# EAGLE board Weather-MM-Carrier-Panel (EAGLE 9.4.2), part 1 of 2
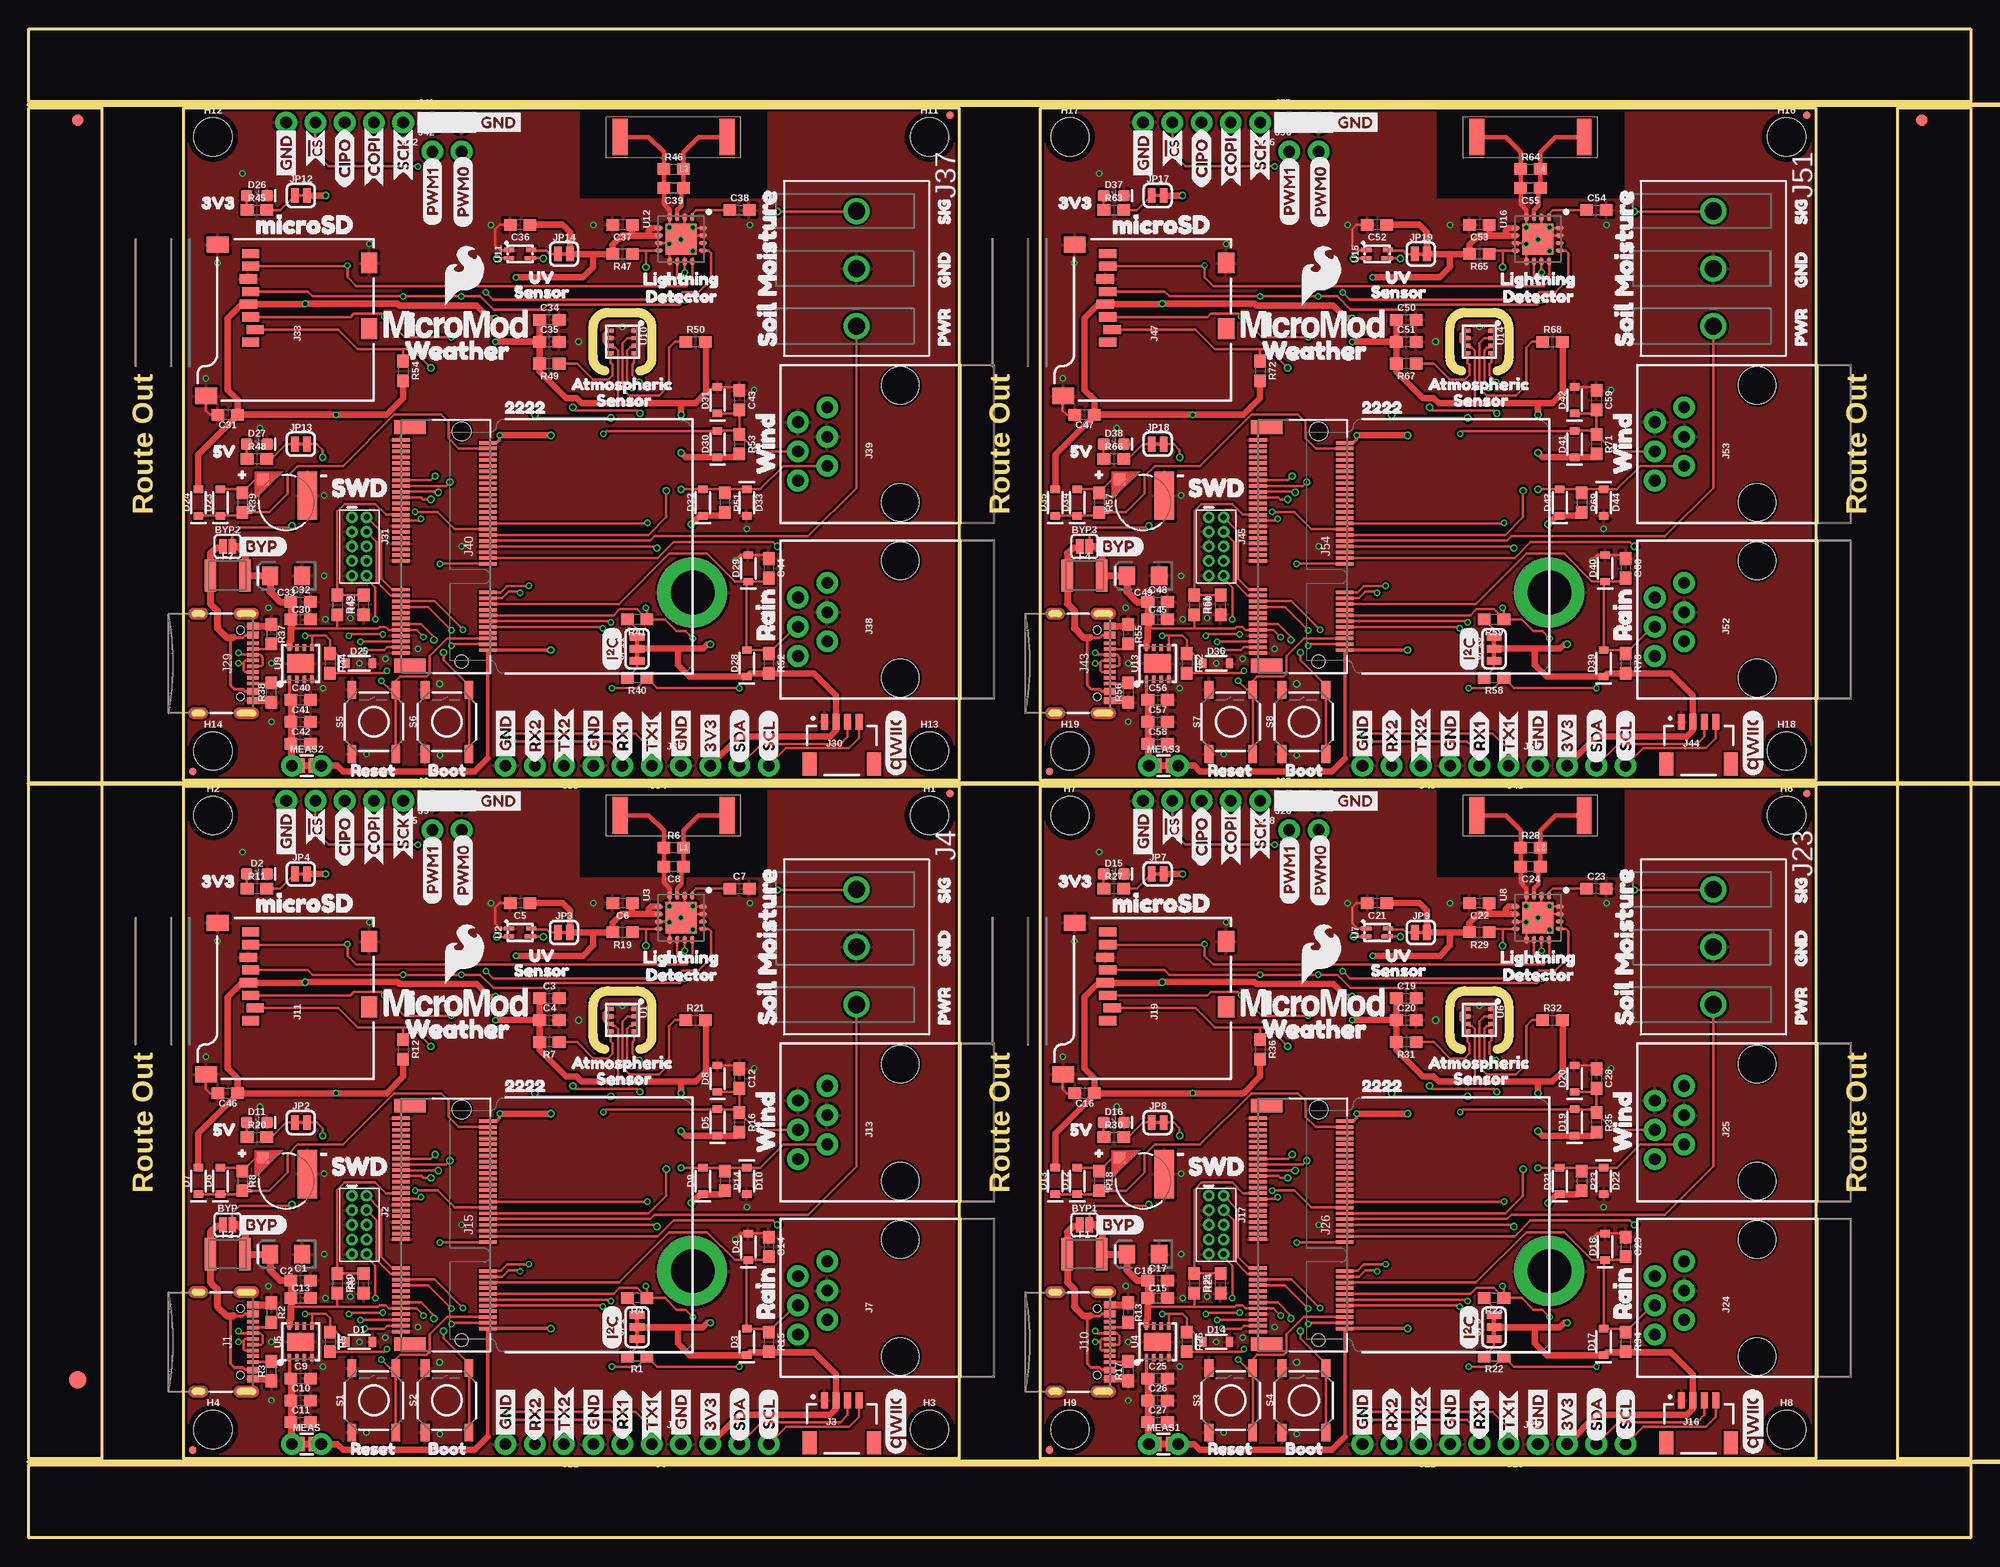
[diagram p0: board, top side]
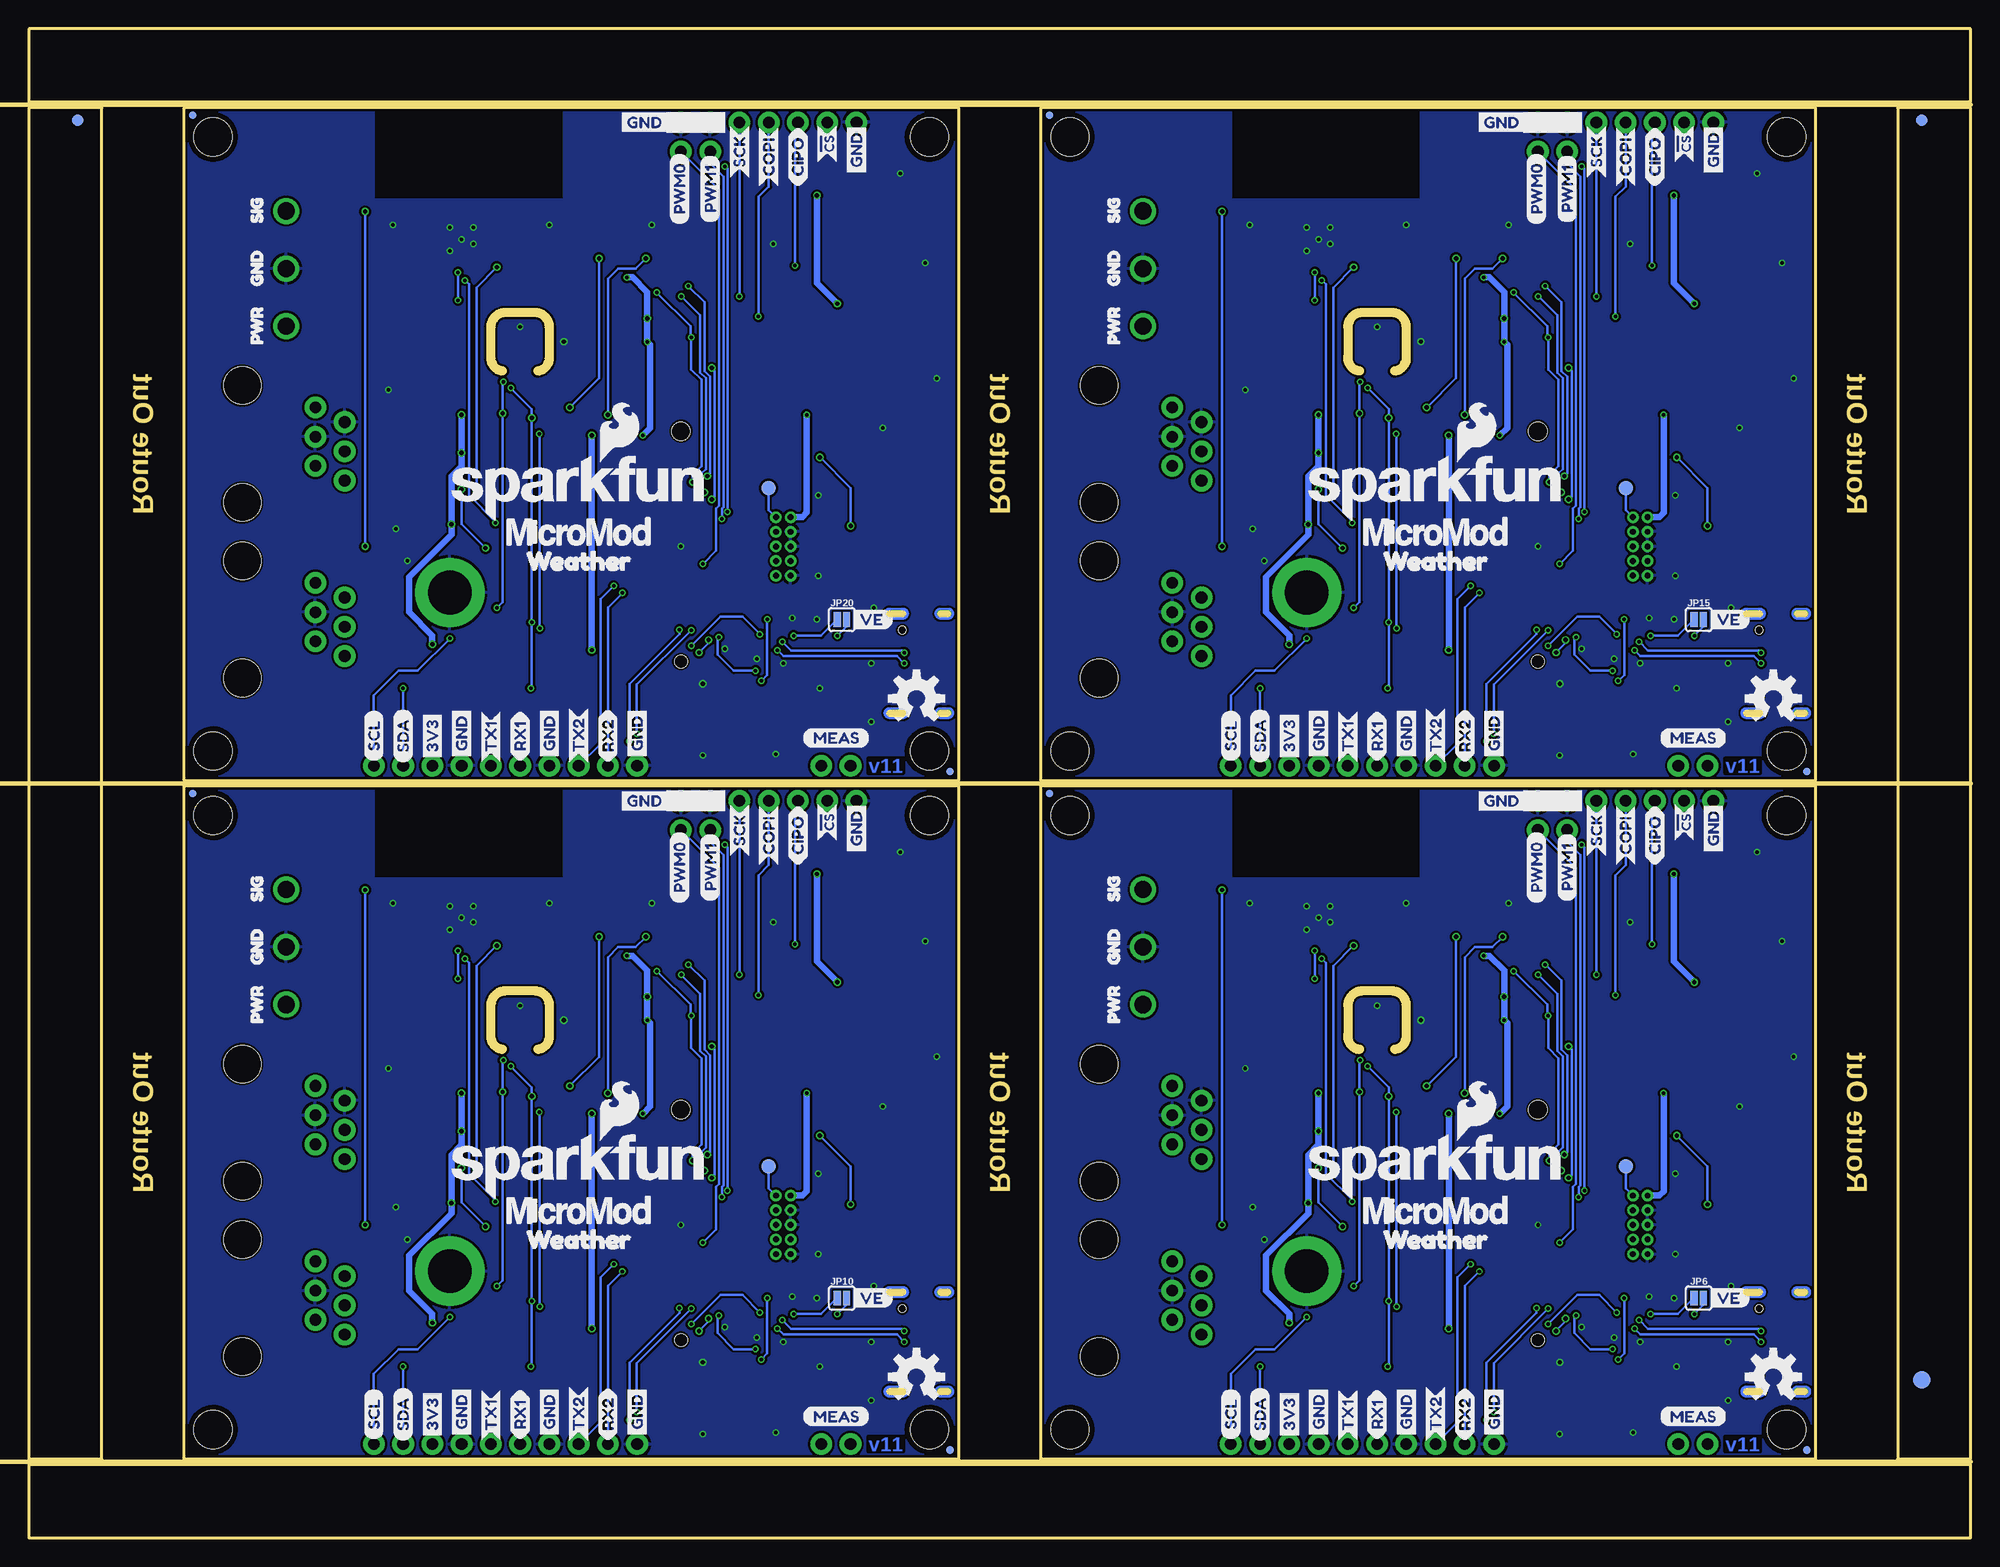
[diagram p1: board, bottom side, seen from below]

Size 168.66 x 131.06 mm. Coordinates in mm from the lower left corner, seen from the top.
Outline: 50.04,42.42 arc-90 49.02,43.69 49.02,46.23 arc-90 50.29,47.5 52.83,47.5 arc-90 54.1,46.23 54.1,43.69 arc-90 53.09,42.42
Outline: 124.46,42.42 arc-90 123.44,43.69 123.44,46.23 arc-90 124.71,47.5 127.25,47.5 arc-90 128.52,46.23 128.52,43.69 arc-90 127.51,42.42
Outline: 50.04,101.35 arc-90 49.02,102.62 49.02,105.16 arc-90 50.29,106.43 52.83,106.43 arc-90 54.1,105.16 54.1,102.62 arc-90 53.09,101.35
Outline: 124.46,101.35 arc-90 123.44,102.62 123.44,105.16 arc-90 124.71,106.43 127.25,106.43 arc-90 128.52,105.16 128.52,102.62 arc-90 127.51,101.35
Outline: 13.46,6.86 13.46,65.28 80.77,65.28 80.77,6.86 13.46,6.86
Outline: 87.88,6.86 87.88,65.28 155.19,65.28 155.19,6.86 87.88,6.86
Outline: 13.46,65.79 13.46,124.21 80.77,124.21 80.77,65.79 13.46,65.79
Outline: 87.88,65.79 87.88,124.21 155.19,124.21 155.19,65.79 87.88,65.79
Outline: 0,6.35 168.66,6.35 168.66,0 0,0 0,6.35
Outline: 162.31,124.21 168.66,124.21 168.66,6.86 162.31,6.86 162.31,124.21
Outline: 0,131.06 168.66,131.06 168.66,124.71 0,124.71 0,131.06
Outline: 0,124.21 6.35,124.21 6.35,6.86 0,6.86 0,124.21
Copper layers (1*16): Top 0.035mm / dielectric 1.5mm / Bottom 0.035mm
Design rules "Weather-MM-Carrier": minimum track width 4mil, minimum drill 6mil, track to track 4mil, track to pad 4mil, pad to pad 4mil, via to via 4mil, smd to smd 4mil, copper to edge 4mil, drill to drill 4mil, minimum pad ring 5mil, minimum via ring 5mil, stop-mask expansion 4mil, vias tented up to drill 25mil, thermal gap 10mil
Net classes: 0 default: width 0 mm, drill 0 mm
tRestrict: 16 lines
Milling: 3 lines

## Footprints (pad centres in the part's own frame; a part is rotated, then mirrored left to right if it is on the bottom)
ML414H_IV01E = smd 1 x 1: + 2.022,2.032 | smd 4.2 x 1.7: - 0.6,-1.85
SMT-JUMPER_2_NO_SILK = smd 0.635 x 1.27: 1 -0.406,0; 2 0.406,0
0603 = smd 1.1 x 1: 1 -0.85,0; 2 0.85,0
EIA3216 = smd 1.4 x 1.6: + 1.4,0; - -1.4,0
SOD-323 = smd 0.63 x 0.83: A 1.15,0; C -1.15,0
LED-0603 = smd 1 x 1: A -0.877,0; C 0.877,0
FIDUCIAL-1X2 = smd 1 x 1: 1 0,0
FIDUCIAL-1.5X3 = smd 1.5 x 1.5: 1 0,0
1210 = smd 1 x 2.8: 1 -1.5,0; 2 1.5,0
FIDUCIAL-MICRO = smd 0.635 x 0.635: 1 0,0
STAND-OFF = hole 3.302: 0,0
STAND-OFF-REFLOW-M2.5 = drill 3.8 pad 6: 1 0,0
USB-C-16P-2LAYER-PADS = smd 0.3 x 1: A5 -1.25,-0.34; A6 -0.25,-0.34; A7 0.25,-0.34; A8 1.25,-0.34; B5 1.75,-0.34; B6 0.75,-0.34; B7 -0.75,-0.34; B8 -1.75,-0.34 | smd 0.6 x 1: GND -3.225,-0.34; GND2 3.225,-0.34; VBUS1 -2.45,-0.34; VBUS2 2.45,-0.34 | drill 0.4 pad 0.6 long: SHLD1 -4.318,-0.915; SHLD2 4.318,-0.915; SHLD3 -4.318,-5.095; SHLD4 4.318,-5.095 | hole 0.65: -2.89,-1.445; 2.89,-1.445
2X5-PTH-1.27MM = drill 0.508 pad 1: 1 -2.54,-0.635; 2 -2.54,0.635; 3 -1.27,-0.635; 4 -1.27,0.635; 5 0,-0.635; 6 0,0.635; 7 1.27,-0.635; 8 1.27,0.635; 9 2.54,-0.635; 10 2.54,0.635
JST04_1MM_RA = smd 0.6 x 1.35: 1 -1.5,0; 2 -0.5,0; 3 0.5,0; 4 1.5,0 | smd 1.2 x 2: NC1 2.8,-3.675; NC2 -2.8,-3.675
LATCHTERMINAL-5MM-3 = drill 1.5: 1 -5,0; 2 0,0; 3 5,0
1X05_NO_SILK = drill 1.016 pad 1.88: 1 0,0; 2 2.54,0; 3 5.08,0; 4 7.62,0; 5 10.16,0
1X03_NO_SILK = drill 1.016 pad 1.88: 1 0,0; 2 2.54,0; 3 5.08,0
RJ11-6 = drill 1.016 pad 1.88: 1 -3.175,8.89; 2 -1.905,6.35; 3 -0.635,8.89; 4 0.635,6.35; 5 1.905,8.89; 6 3.175,6.35 | hole 3.251: -5.08,0; 5.08,0
1X02_NO_SILK = drill 1.016 pad 1.88: 1 0,0; 2 2.54,0
MICRO-SD-SOCKET = smd 1.8 x 1.4: CD1 -2.05,0.4; CD2 -7.75,0.4 | smd 0.8 x 1.5: CS/DAT3 -7.84,10.3; DAT1 -1.24,10.7; DAT2 -8.94,10.7; DI/CMD -6.74,10.7; DO/DAT0 -2.34,10.7; GND -3.44,10.9; SCLK -4.54,10.7; VCC -5.64,10.9 | smd 1.4 x 1.9: GND1 -13.6,14.55; GND3 -0.45,13.55
1X04_NO_SILK = drill 1.016 pad 1.88: 1 0,0; 2 2.54,0; 3 5.08,0; 4 7.62,0
M.2-CONNECTOR-E = smd 0.3 x 1.55: 1 9.25,-5.275; 2 9,2.275; 3 8.75,-5.275; 4 8.5,2.275; 5 8.25,-5.275; 6 8,2.275; 7 7.75,-5.275; 8 7.5,2.275; 9 7.25,-5.275; 10 7,2.275; 11 6.75,-5.275; 12 6.5,2.275; 13 6.25,-5.275; 14 6,2.275; 15 5.75,-5.275; 16 5.5,2.275; 17 5.25,-5.275; 18 5,2.275; 19 4.75,-5.275; 20 4.5,2.275; 21 4.25,-5.275; 22 4,2.275; 23 3.75,-5.275; 32 1.5,2.275; 33 1.25,-5.275; 34 1,2.275; 35 0.75,-5.275; 36 0.5,2.275; 37 0.25,-5.275; 38 0,2.275; 39 -0.25,-5.275; 40 -0.5,2.275; 41 -0.75,-5.275; 42 -1,2.275; 43 -1.25,-5.275; 44 -1.5,2.275; 45 -1.75,-5.275; 46 -2,2.275; 47 -2.25,-5.275; 48 -2.5,2.275; 49 -2.75,-5.275; 50 -3,2.275; 51 -3.25,-5.275; 52 -3.5,2.275; 53 -3.75,-5.275; 54 -4,2.275; 55 -4.25,-5.275; 56 -4.5,2.275; 57 -4.75,-5.275; 58 -5,2.275; 59 -5.25,-5.275; 60 -5.5,2.275; 61 -5.75,-5.275; 62 -6,2.275; 63 -6.25,-5.275; 64 -6.5,2.275; 65 -6.75,-5.275; 66 -7,2.275; 67 -7.25,-5.275; 68 -7.5,2.275; 69 -7.75,-5.275; 70 -8,2.275; 71 -8.25,-5.275; 72 -8.5,2.275; 73 -8.75,-5.275; 74 -9,2.275; 75 -9.25,-5.275 | smd 1.2 x 2.75: A1 10.35,-4.5; A2 -10.35,-4.5 | hole 1.1: 10,0 | hole 1.6: -10,0
SMT-JUMPER_3_2-NC_TRACE_SILK = smd 0.66 x 1.27: 1 -1.041,0; 2 0,0; 3 1.041,0
SMT-JUMPER_2_NC_TRACE_SILK = smd 0.66 x 1.27: 1 -0.521,0; 2 0.521,0
MA5532-AE = smd 1.3 x 3.2: 1 -4.65,0; 2 4.65,0
COMBO-JUMPER_2_NC_TRACE = smd 0.635 x 1.27: 1 -0.508,0; 2 0.508,0 | drill 1.016 pad 1.88: 3 -1.27,0; 4 1.27,0
TACTILE_SWITCH_SMD_5.2MM = smd 1.524 x 0.762: 1 -2.794,1.905; 2 2.794,1.905; 3 -2.794,-1.905; 4 2.794,-1.905
PAD.03X.05 = smd 1.27 x 1.27: P$1 0,0
LGA-8-2.5X2.5 = smd 0.35 x 0.5: 1 -0.975,1.025; 2 -0.325,1.025; 3 0.325,1.025; 4 0.975,1.025; 5 0.975,-1.025; 6 0.325,-1.025; 7 -0.325,-1.025; 8 -0.975,-1.025
VEML6075_A3OP = smd 0.9 x 0.35: 1 -0.95,0.35; 2 -0.95,-0.35; 4 0.95,0.35 | smd 1 x 0.35: 3 0.9,-0.35
16LD_MLPQ = smd 0.7 x 0.35: 1 -1.919,0.968; 2 -1.919,0.318; 3 -1.919,-0.332; 4 -1.919,-0.982; 9 1.908,-0.982; 10 1.908,-0.332; 11 1.908,0.318; 12 1.908,0.968 | smd 0.35 x 0.7: 5 -0.982,-1.917; 6 -0.332,-1.917; 7 0.318,-1.917; 8 0.968,-1.917; 13 0.968,1.907; 14 0.318,1.907; 15 -0.332,1.907; 16 -0.982,1.907 | smd 2.7 x 2.7: 17 -0.007,-0.007
UDFN-8 = smd 0.3 x 0.65: 1 -0.975,-1.375; 2 -0.325,-1.375; 3 0.325,-1.375; 4 0.975,-1.375; 5 0.975,1.375; 6 0.325,1.375; 7 -0.325,1.375; 8 -0.975,1.375 | smd 2.35 x 1.6: EP 0,0

## Placement (x,y rotation side)
BT1  ML414H  [ML414H_IV01E]  22.35,30.99 90 top
BT2  ML414H  [ML414H_IV01E]  96.77,30.99 90 top
BT3  ML414H  [ML414H_IV01E]  22.35,89.92 90 top
BT4  ML414H  [ML414H_IV01E]  96.77,89.92 90 top
BYP  JUMPER-SMT_2_NO_SILK  [SMT-JUMPER_2_NO_SILK]  17.27,27.18 0 top
BYP1  JUMPER-SMT_2_NO_SILK  [SMT-JUMPER_2_NO_SILK]  91.69,27.18 0 top
BYP2  JUMPER-SMT_2_NO_SILK  [SMT-JUMPER_2_NO_SILK]  17.27,86.11 0 top
BYP3  JUMPER-SMT_2_NO_SILK  [SMT-JUMPER_2_NO_SILK]  91.69,86.11 0 top
C1  0.1uF  [0603]  23.62,22.35 0 top
C2  10uF  [EIA3216]  22.35,24.64 180 top
C3  0.1uF  [0603]  45.21,46.86 0 top
C4  0.1uF  [0603]  45.21,44.96 0 top
C5  0.1uF  [0603]  42.67,55.12 180 top
C6  1.0uF  [0603]  51.56,55.12 180 top
C7  10uF  [0603]  61.72,56.39 0 top
C8  1nF  [0603]  56.01,58.29 180 top
C9  10uF  [0603]  23.62,13.84 0 top
C10  1.0uF  [0603]  23.62,11.94 0 top
C11  0.22uF  [0603]  23.62,10.03 0 top
C12  0.1uF  [0603]  61.72,39.88 270 top
C13  0.22uF  [0603]  23.62,20.83 0 top
C14  0.1uF  [0603]  64.26,25.27 270 top
C15  0.22uF  [0603]  98.04,20.83 0 top
C16  0.1uF  [0603]  91.69,38.61 180 top
C17  0.1uF  [0603]  98.04,22.35 0 top
C18  10uF  [EIA3216]  96.77,24.64 180 top
C19  0.1uF  [0603]  119.63,46.86 0 top
C20  0.1uF  [0603]  119.63,44.96 0 top
C21  0.1uF  [0603]  117.09,55.12 180 top
C22  1.0uF  [0603]  125.98,55.12 180 top
C23  10uF  [0603]  136.14,56.39 0 top
C24  1nF  [0603]  130.43,58.29 180 top
C25  10uF  [0603]  98.04,13.84 0 top
C26  1.0uF  [0603]  98.04,11.94 0 top
C27  0.22uF  [0603]  98.04,10.03 0 top
C28  0.1uF  [0603]  136.14,39.88 270 top
C29  0.1uF  [0603]  138.68,25.27 270 top
C30  0.22uF  [0603]  23.62,79.76 0 top
C31  0.1uF  [0603]  17.27,97.54 180 top
C32  0.1uF  [0603]  23.62,81.28 0 top
C33  10uF  [EIA3216]  22.35,83.57 180 top
C34  0.1uF  [0603]  45.21,105.79 0 top
C35  0.1uF  [0603]  45.21,103.89 0 top
C36  0.1uF  [0603]  42.67,114.05 180 top
C37  1.0uF  [0603]  51.56,114.05 180 top
C38  10uF  [0603]  61.72,115.32 0 top
C39  1nF  [0603]  56.01,117.22 180 top
C40  10uF  [0603]  23.62,72.77 0 top
C41  1.0uF  [0603]  23.62,70.87 0 top
C42  0.22uF  [0603]  23.62,68.96 0 top
C43  0.1uF  [0603]  61.72,98.81 270 top
C44  0.1uF  [0603]  64.26,84.2 270 top
C45  0.22uF  [0603]  98.04,79.76 0 top
C46  0.1uF  [0603]  17.27,38.61 180 top
C47  0.1uF  [0603]  91.69,97.54 180 top
C48  0.1uF  [0603]  98.04,81.28 0 top
C49  10uF  [EIA3216]  96.77,83.57 180 top
C50  0.1uF  [0603]  119.63,105.79 0 top
C51  0.1uF  [0603]  119.63,103.89 0 top
C52  0.1uF  [0603]  117.09,114.05 180 top
C53  1.0uF  [0603]  125.98,114.05 180 top
C54  10uF  [0603]  136.14,115.32 0 top
C55  1nF  [0603]  130.43,117.22 180 top
C56  10uF  [0603]  98.04,72.77 0 top
C57  1.0uF  [0603]  98.04,70.87 0 top
C58  0.22uF  [0603]  98.04,68.96 0 top
C59  0.1uF  [0603]  136.14,98.81 270 top
C60  0.1uF  [0603]  138.68,84.2 270 top
D1  3.3V  [SOD-323]  28.7,17.02 0 top
D2  RED  [LED-0603]  19.81,57.66 0 top
D3  250mA/100V  [SOD-323]  62.36,17.02 90 top
D4  250mA/100V  [SOD-323]  62.48,25.27 90 top
D5  250mA/100V  [SOD-323]  59.82,36.07 90 top
D6  3A/10V/280mV  [SOD-323]  16.64,30.99 90 top
D7  1A/23V/620mV  [SOD-323]  14.73,30.99 90 top
D8  250mA/100V  [SOD-323]  59.82,39.88 90 top
D9  250mA/100V  [SOD-323]  58.55,30.99 90 top
D10  250mA/100V  [SOD-323]  62.36,30.99 270 top
D11  RED  [LED-0603]  19.81,36.07 0 top
D12  3A/10V/280mV  [SOD-323]  91.06,30.99 90 top
D13  1A/23V/620mV  [SOD-323]  89.15,30.99 90 top
D14  3.3V  [SOD-323]  103.12,17.02 0 top
D15  RED  [LED-0603]  94.23,57.66 0 top
D16  RED  [LED-0603]  94.23,36.07 0 top
D17  250mA/100V  [SOD-323]  136.78,17.02 90 top
D18  250mA/100V  [SOD-323]  136.91,25.27 90 top
D19  250mA/100V  [SOD-323]  134.24,36.07 90 top
D20  250mA/100V  [SOD-323]  134.24,39.88 90 top
D21  250mA/100V  [SOD-323]  132.97,30.99 90 top
D22  250mA/100V  [SOD-323]  136.78,30.99 270 top
D23  3A/10V/280mV  [SOD-323]  16.64,89.92 90 top
D24  1A/23V/620mV  [SOD-323]  14.73,89.92 90 top
D25  3.3V  [SOD-323]  28.7,75.95 0 top
D26  RED  [LED-0603]  19.81,116.59 0 top
D27  RED  [LED-0603]  19.81,95 0 top
D28  250mA/100V  [SOD-323]  62.36,75.95 90 top
D29  250mA/100V  [SOD-323]  62.48,84.2 90 top
D30  250mA/100V  [SOD-323]  59.82,95 90 top
D31  250mA/100V  [SOD-323]  59.82,98.81 90 top
D32  250mA/100V  [SOD-323]  58.55,89.92 90 top
D33  250mA/100V  [SOD-323]  62.36,89.92 270 top
D34  3A/10V/280mV  [SOD-323]  91.06,89.92 90 top
D35  1A/23V/620mV  [SOD-323]  89.15,89.92 90 top
D36  3.3V  [SOD-323]  103.12,75.95 0 top
D37  RED  [LED-0603]  94.23,116.59 0 top
D38  RED  [LED-0603]  94.23,95 0 top
D39  250mA/100V  [SOD-323]  136.78,75.95 90 top
D40  250mA/100V  [SOD-323]  136.91,84.2 90 top
D41  250mA/100V  [SOD-323]  134.24,95 90 top
D42  250mA/100V  [SOD-323]  134.24,98.81 90 top
D43  250mA/100V  [SOD-323]  132.97,89.92 90 top
D44  250mA/100V  [SOD-323]  136.78,89.92 270 top
E$1  [FIDUCIAL-1X2]  4.23,123.13 0 top
E$2  [FIDUCIAL-1X2]  4.23,123.13 0 bottom
E$3  [FIDUCIAL-1X2]  164.42,123.13 0 top
E$4  [FIDUCIAL-1X2]  164.42,123.13 0 bottom
E$5  [FIDUCIAL-1.5X3]  4.23,13.72 0 top
E$6  [FIDUCIAL-1.5X3]  4.23,13.72 0 bottom
F1  6V/2A  [1210]  91.69,24.64 0 top
F2  6V/2A  [1210]  17.27,24.64 0 top
F3  6V/2A  [1210]  17.27,83.57 0 top
F4  6V/2A  [1210]  91.69,83.57 0 top
FD1  FIDUCIALUFIDUCIAL  [FIDUCIAL-MICRO]  14.22,7.62 0 top
FD2  FIDUCIALUFIDUCIAL  [FIDUCIAL-MICRO]  80.01,64.64 0 top
FD3  FIDUCIALUFIDUCIAL  [FIDUCIAL-MICRO]  14.22,7.62 0 bottom
FD4  FIDUCIALUFIDUCIAL  [FIDUCIAL-MICRO]  80.01,64.64 0 bottom
FD5  FIDUCIALUFIDUCIAL  [FIDUCIAL-MICRO]  88.65,7.62 0 top
FD6  FIDUCIALUFIDUCIAL  [FIDUCIAL-MICRO]  154.43,64.64 0 top
FD7  FIDUCIALUFIDUCIAL  [FIDUCIAL-MICRO]  88.65,7.62 0 bottom
FD8  FIDUCIALUFIDUCIAL  [FIDUCIAL-MICRO]  154.43,64.64 0 bottom
FD9  FIDUCIALUFIDUCIAL  [FIDUCIAL-MICRO]  14.22,66.55 0 top
FD10  FIDUCIALUFIDUCIAL  [FIDUCIAL-MICRO]  80.01,123.57 0 top
FD11  FIDUCIALUFIDUCIAL  [FIDUCIAL-MICRO]  14.22,66.55 0 bottom
FD12  FIDUCIALUFIDUCIAL  [FIDUCIAL-MICRO]  80.01,123.57 0 bottom
FD13  FIDUCIALUFIDUCIAL  [FIDUCIAL-MICRO]  88.65,66.55 0 top
FD14  FIDUCIALUFIDUCIAL  [FIDUCIAL-MICRO]  154.43,123.57 0 top
FD15  FIDUCIALUFIDUCIAL  [FIDUCIAL-MICRO]  88.65,66.55 0 bottom
FD16  FIDUCIALUFIDUCIAL  [FIDUCIAL-MICRO]  154.43,123.57 0 bottom
H1  STAND-OFF  [STAND-OFF]  78.23,62.74 0 top
H2  STAND-OFF  [STAND-OFF]  16,62.74 0 top
H3  STAND-OFF  [STAND-OFF]  78.23,9.4 0 top
H4  STAND-OFF  [STAND-OFF]  16,9.4 0 top
H5  STAND-OFF-REFLOW2.5MM_TALL  [STAND-OFF-REFLOW-M2.5]  57.66,23.16 0 top
H6  STAND-OFF  [STAND-OFF]  152.65,62.74 0 top
H7  STAND-OFF  [STAND-OFF]  90.42,62.74 0 top
H8  STAND-OFF  [STAND-OFF]  152.65,9.4 0 top
H9  STAND-OFF  [STAND-OFF]  90.42,9.4 0 top
H10  STAND-OFF-REFLOW2.5MM_TALL  [STAND-OFF-REFLOW-M2.5]  132.08,23.16 0 top
H11  STAND-OFF  [STAND-OFF]  78.23,121.67 0 top
H12  STAND-OFF  [STAND-OFF]  16,121.67 0 top
H13  STAND-OFF  [STAND-OFF]  78.23,68.33 0 top
H14  STAND-OFF  [STAND-OFF]  16,68.33 0 top
H15  STAND-OFF-REFLOW2.5MM_TALL  [STAND-OFF-REFLOW-M2.5]  57.66,82.09 0 top
H16  STAND-OFF  [STAND-OFF]  152.65,121.67 0 top
H17  STAND-OFF  [STAND-OFF]  90.42,121.67 0 top
H18  STAND-OFF  [STAND-OFF]  152.65,68.33 0 top
H19  STAND-OFF  [STAND-OFF]  90.42,68.33 0 top
H20  STAND-OFF-REFLOW2.5MM_TALL  [STAND-OFF-REFLOW-M2.5]  132.08,82.09 0 top
J1  [USB-C-16P-2LAYER-PADS]  19.81,17.02 270 top
J2  JTAG  [2X5-PTH-1.27MM]  28.7,27.18 270 top
J3  QWIIC_RIGHT_ANGLE  [JST04_1MM_RA]  70.61,11.94 0 top
J4  [LATCHTERMINAL-5MM-3]  71.88,51.31 270 top
J5  [1X05_NO_SILK]  32.51,64.01 180 top
J6  [1X03_NO_SILK]  54.1,8.13 180 top
J7  RJ11 - RAIN  [RJ11-6]  75.69,20.83 90 top
J8  [1X02_NO_SILK]  35.05,64.01 0 top
J9  [1X02_NO_SILK]  35.05,61.47 0 top
J10  [USB-C-16P-2LAYER-PADS]  94.23,17.02 270 top
J11  microSD  [MICRO-SD-SOCKET]  29.97,53.85 90 top
J12  [1X03_NO_SILK]  46.48,8.13 180 top
J13  RJ11 - WIND  [RJ11-6]  75.69,36.07 90 top
J14  [1X04_NO_SILK]  56.64,8.13 0 top
J15  MICROMOD-2222-C  [M.2-CONNECTOR-E]  37.59,27.18 270 top
J16  QWIIC_RIGHT_ANGLE  [JST04_1MM_RA]  145.03,11.94 0 top
J17  JTAG  [2X5-PTH-1.27MM]  103.12,27.18 270 top
J18  [1X05_NO_SILK]  106.93,64.01 180 top
J19  microSD  [MICRO-SD-SOCKET]  104.39,53.85 90 top
J20  [1X03_NO_SILK]  128.52,8.13 180 top
J21  [1X03_NO_SILK]  120.9,8.13 180 top
J22  [1X04_NO_SILK]  131.06,8.13 0 top
J23  [LATCHTERMINAL-5MM-3]  146.3,51.31 270 top
J24  RJ11 - RAIN  [RJ11-6]  150.11,20.83 90 top
J25  RJ11 - WIND  [RJ11-6]  150.11,36.07 90 top
J26  MICROMOD-2222-C  [M.2-CONNECTOR-E]  112.01,27.18 270 top
J27  [1X02_NO_SILK]  109.47,64.01 0 top
J28  [1X02_NO_SILK]  109.47,61.47 0 top
J29  [USB-C-16P-2LAYER-PADS]  19.81,75.95 270 top
J30  QWIIC_RIGHT_ANGLE  [JST04_1MM_RA]  70.61,70.87 0 top
J31  JTAG  [2X5-PTH-1.27MM]  28.7,86.11 270 top
J32  [1X05_NO_SILK]  32.51,122.94 180 top
J33  microSD  [MICRO-SD-SOCKET]  29.97,112.78 90 top
J34  [1X03_NO_SILK]  54.1,67.06 180 top
J35  [1X03_NO_SILK]  46.48,67.06 180 top
J36  [1X04_NO_SILK]  56.64,67.06 0 top
J37  [LATCHTERMINAL-5MM-3]  71.88,110.24 270 top
J38  RJ11 - RAIN  [RJ11-6]  75.69,79.76 90 top
J39  RJ11 - WIND  [RJ11-6]  75.69,95 90 top
J40  MICROMOD-2222-C  [M.2-CONNECTOR-E]  37.59,86.11 270 top
J41  [1X02_NO_SILK]  35.05,122.94 0 top
J42  [1X02_NO_SILK]  35.05,120.4 0 top
J43  [USB-C-16P-2LAYER-PADS]  94.23,75.95 270 top
J44  QWIIC_RIGHT_ANGLE  [JST04_1MM_RA]  145.03,70.87 0 top
J45  JTAG  [2X5-PTH-1.27MM]  103.12,86.11 270 top
J46  [1X05_NO_SILK]  106.93,122.94 180 top
J47  microSD  [MICRO-SD-SOCKET]  104.39,112.78 90 top
J48  [1X03_NO_SILK]  128.52,67.06 180 top
J49  [1X03_NO_SILK]  120.9,67.06 180 top
J50  [1X04_NO_SILK]  131.06,67.06 0 top
J51  [LATCHTERMINAL-5MM-3]  146.3,110.24 270 top
J52  RJ11 - RAIN  [RJ11-6]  150.11,79.76 90 top
J53  RJ11 - WIND  [RJ11-6]  150.11,95 90 top
J54  MICROMOD-2222-C  [M.2-CONNECTOR-E]  112.01,86.11 270 top
J55  [1X02_NO_SILK]  109.47,122.94 0 top
J56  [1X02_NO_SILK]  109.47,120.4 0 top
JP1  [SMT-JUMPER_3_2-NC_TRACE_SILK]  52.83,18.29 90 top
JP2  VIN LED  [SMT-JUMPER_2_NC_TRACE_SILK]  23.62,36.07 0 top
JP3  UV  [SMT-JUMPER_2_NC_TRACE_SILK]  46.48,52.58 0 top
JP4  3V3 LED  [SMT-JUMPER_2_NC_TRACE_SILK]  23.62,57.66 0 top
JP5  [SMT-JUMPER_3_2-NC_TRACE_SILK]  127.25,18.29 90 top
JP6  VE  [SMT-JUMPER_2_NO_SILK]  23.62,20.83 0 bottom
JP7  3V3 LED  [SMT-JUMPER_2_NC_TRACE_SILK]  98.04,57.66 0 top
JP8  VIN LED  [SMT-JUMPER_2_NC_TRACE_SILK]  98.04,36.07 0 top
JP9  UV  [SMT-JUMPER_2_NC_TRACE_SILK]  120.9,52.58 0 top
JP10  VE  [SMT-JUMPER_2_NO_SILK]  98.04,20.83 0 bottom
JP11  [SMT-JUMPER_3_2-NC_TRACE_SILK]  52.83,77.22 90 top
JP12  3V3 LED  [SMT-JUMPER_2_NC_TRACE_SILK]  23.62,116.59 0 top
JP13  VIN LED  [SMT-JUMPER_2_NC_TRACE_SILK]  23.62,95 0 top
JP14  UV  [SMT-JUMPER_2_NC_TRACE_SILK]  46.48,111.51 0 top
JP15  VE  [SMT-JUMPER_2_NO_SILK]  23.62,79.76 0 bottom
JP16  [SMT-JUMPER_3_2-NC_TRACE_SILK]  127.25,77.22 90 top
JP17  3V3 LED  [SMT-JUMPER_2_NC_TRACE_SILK]  98.04,116.59 0 top
JP18  VIN LED  [SMT-JUMPER_2_NC_TRACE_SILK]  98.04,95 0 top
JP19  UV  [SMT-JUMPER_2_NC_TRACE_SILK]  120.9,111.51 0 top
JP20  VE  [SMT-JUMPER_2_NO_SILK]  98.04,79.76 0 bottom
L1  100uH  [MA5532-AE]  56.01,62.74 180 top
L2  100uH  [MA5532-AE]  130.43,62.74 180 top
L3  100uH  [MA5532-AE]  56.01,121.67 180 top
L4  100uH  [MA5532-AE]  130.43,121.67 180 top
LOGO1  SFE_LOGO_NAME_FLAME.2_INCH  [SFE_LOGO_NAME_FLAME_.2]  46.48,32.26 0 bottom
LOGO2  QWIIC_LOGO_CONNECTOR  [QWIIC_5.5MM]  75.31,10.1 90 top
LOGO3  OSHW-LOGOM  [OSHW-LOGO-M]  17.14,13.97 0 bottom
LOGO4  QWIIC_LOGO_CONNECTOR  [QWIIC_5.5MM]  149.73,10.1 90 top
LOGO5  OSHW-LOGOM  [OSHW-LOGO-M]  91.57,13.97 0 bottom
LOGO6  SFE_LOGO_NAME_FLAME.2_INCH  [SFE_LOGO_NAME_FLAME_.2]  120.9,32.26 0 bottom
LOGO7  QWIIC_LOGO_CONNECTOR  [QWIIC_5.5MM]  75.31,69.02 90 top
LOGO8  OSHW-LOGOM  [OSHW-LOGO-M]  17.14,72.9 0 bottom
LOGO9  SFE_LOGO_NAME_FLAME.2_INCH  [SFE_LOGO_NAME_FLAME_.2]  46.48,91.19 0 bottom
LOGO10  QWIIC_LOGO_CONNECTOR  [QWIIC_5.5MM]  149.73,69.02 90 top
LOGO11  OSHW-LOGOM  [OSHW-LOGO-M]  91.57,72.9 0 bottom
LOGO12  SFE_LOGO_NAME_FLAME.2_INCH  [SFE_LOGO_NAME_FLAME_.2]  120.9,91.19 0 bottom
MEAS  [COMBO-JUMPER_2_NC_TRACE]  24.13,8.13 0 top
MEAS1  [COMBO-JUMPER_2_NC_TRACE]  98.55,8.13 0 top
MEAS2  [COMBO-JUMPER_2_NC_TRACE]  24.13,67.06 0 top
MEAS3  [COMBO-JUMPER_2_NC_TRACE]  98.55,67.06 0 top
R1  2.2k  [0603]  52.83,15.75 180 top
R2  5.1k  [0603]  21.08,19.56 270 top
R3  5.1k  [0603]  21.08,14.48 90 top
R4  2.2k  [0603]  52.83,20.83 180 top
R5  100k  [0603]  26.16,17.02 270 top
R6  10k  [0603]  56.01,59.94 0 top
R7  10k  [0603]  45.21,43.05 180 top
R8  3.3k  [0603]  18.54,30.99 270 top
R9  10k  [0603]  29.08,22.1 90 top
R10  20k  [0603]  26.8,22.1 270 top
R11  1k  [0603]  19.81,56.39 0 top
R12  100k  [0603]  32.51,42.42 270 top
R13  5.1k  [0603]  95.5,19.56 270 top
R14  10k  [0603]  60.45,30.99 270 top
R15  43k  [0603]  64.26,17.02 270 top
R16  43k  [0603]  61.72,36.07 270 top
R17  5.1k  [0603]  95.5,14.48 90 top
R18  3.3k  [0603]  92.96,30.99 270 top
R19  100k  [0603]  51.56,52.58 180 top
R20  1k  [0603]  19.81,34.8 0 top
R21  10k  [0603]  57.91,44.96 0 top
R22  2.2k  [0603]  127.25,15.75 180 top
R23  2.2k  [0603]  127.25,20.83 180 top
R24  10k  [0603]  103.51,22.1 90 top
R25  20k  [0603]  101.22,22.1 270 top
R26  100k  [0603]  100.58,17.02 270 top
R27  1k  [0603]  94.23,56.39 0 top
R28  10k  [0603]  130.43,59.94 0 top
R29  100k  [0603]  125.98,52.58 180 top
R30  1k  [0603]  94.23,34.8 0 top
R31  10k  [0603]  119.63,43.05 180 top
R32  10k  [0603]  132.33,44.96 0 top
R33  10k  [0603]  134.87,30.99 270 top
R34  43k  [0603]  138.68,17.02 270 top
R35  43k  [0603]  136.14,36.07 270 top
R36  100k  [0603]  106.93,42.42 270 top
R37  5.1k  [0603]  21.08,78.49 270 top
R38  5.1k  [0603]  21.08,73.41 90 top
R39  3.3k  [0603]  18.54,89.92 270 top
R40  2.2k  [0603]  52.83,74.68 180 top
R41  2.2k  [0603]  52.83,79.76 180 top
R42  10k  [0603]  29.08,81.03 90 top
R43  20k  [0603]  26.8,81.03 270 top
R44  100k  [0603]  26.16,75.95 270 top
R45  1k  [0603]  19.81,115.32 0 top
R46  10k  [0603]  56.01,118.87 0 top
R47  100k  [0603]  51.56,111.51 180 top
R48  1k  [0603]  19.81,93.73 0 top
R49  10k  [0603]  45.21,101.98 180 top
R50  10k  [0603]  57.91,103.89 0 top
R51  10k  [0603]  60.45,89.92 270 top
R52  43k  [0603]  64.26,75.95 270 top
R53  43k  [0603]  61.72,95 270 top
R54  100k  [0603]  32.51,101.35 270 top
R55  5.1k  [0603]  95.5,78.49 270 top
R56  5.1k  [0603]  95.5,73.41 90 top
R57  3.3k  [0603]  92.96,89.92 270 top
R58  2.2k  [0603]  127.25,74.68 180 top
R59  2.2k  [0603]  127.25,79.76 180 top
R60  10k  [0603]  103.51,81.03 90 top
R61  20k  [0603]  101.22,81.03 270 top
R62  100k  [0603]  100.58,75.95 270 top
R63  1k  [0603]  94.23,115.32 0 top
R64  10k  [0603]  130.43,118.87 0 top
R65  100k  [0603]  125.98,111.51 180 top
R66  1k  [0603]  94.23,93.73 0 top
R67  10k  [0603]  119.63,101.98 180 top
R68  10k  [0603]  132.33,103.89 0 top
R69  10k  [0603]  134.87,89.92 270 top
R70  43k  [0603]  138.68,75.95 270 top
R71  43k  [0603]  136.14,95 270 top
R72  100k  [0603]  106.93,101.35 270 top
S1  Reset  [TACTILE_SWITCH_SMD_5.2MM]  29.97,11.94 90 top
S2  BOOT  [TACTILE_SWITCH_SMD_5.2MM]  36.32,11.94 90 top
S3  Reset  [TACTILE_SWITCH_SMD_5.2MM]  104.39,11.94 90 top
S4  BOOT  [TACTILE_SWITCH_SMD_5.2MM]  110.74,11.94 90 top
S5  Reset  [TACTILE_SWITCH_SMD_5.2MM]  29.97,70.87 90 top
S6  BOOT  [TACTILE_SWITCH_SMD_5.2MM]  36.32,70.87 90 top
S7  Reset  [TACTILE_SWITCH_SMD_5.2MM]  104.39,70.87 90 top
S8  BOOT  [TACTILE_SWITCH_SMD_5.2MM]  110.74,70.87 90 top
TP1  TEST-POINT3X5  [PAD.03X.05]  29.97,32.26 0 bottom
TP2  TEST-POINT3X5  [PAD.03X.05]  104.39,32.26 0 bottom
TP3  TEST-POINT3X5  [PAD.03X.05]  29.97,91.19 0 bottom
TP4  TEST-POINT3X5  [PAD.03X.05]  104.39,91.19 0 bottom
U1  BME280  [LGA-8-2.5X2.5]  51.56,44.96 270 top
U2  VEML6075  [VEML6075_A3OP]  42.67,52.58 0 top
U3  AS3935  [16LD_MLPQ]  56.64,53.85 270 top
U4  AP7361C-33FGEUDFN-8  [UDFN-8]  98.04,17.02 0 top
U5  AP7361C-33FGEUDFN-8  [UDFN-8]  23.62,17.02 0 top
U6  BME280  [LGA-8-2.5X2.5]  125.98,44.96 270 top
U7  VEML6075  [VEML6075_A3OP]  117.09,52.58 0 top
U8  AS3935  [16LD_MLPQ]  131.06,53.85 270 top
U9  AP7361C-33FGEUDFN-8  [UDFN-8]  23.62,75.95 0 top
U10  BME280  [LGA-8-2.5X2.5]  51.56,103.89 270 top
U11  VEML6075  [VEML6075_A3OP]  42.67,111.51 0 top
U12  AS3935  [16LD_MLPQ]  56.64,112.78 270 top
U13  AP7361C-33FGEUDFN-8  [UDFN-8]  98.04,75.95 0 top
U14  BME280  [LGA-8-2.5X2.5]  125.98,103.89 270 top
U15  VEML6075  [VEML6075_A3OP]  117.09,111.51 0 top
U16  AS3935  [16LD_MLPQ]  131.06,112.78 270 top
U$1  [3V31]  14.1,57.02 0 top
U$2  [RESET3]  27.05,7.75 0 top
U$3  [RAIN1]  64.01,17.65 90 top
U$4  [GND0]  79.5,48.77 90 top
U$5  [MEAS]  27.05,10.54 0 bottom
U$6  [GND_P]  22.35,58.93 90 top
U$7  [COPI0]  29.97,58.42 90 top
U$8  [COPI0]  29.97,58.42 90 bottom
U$9  [SCK_O]  32.51,58.93 90 top
U$10  [!CS_O]  24.89,59.94 90 top
U$11  [GND_P]  43.18,64.01 0 bottom
U$12  [PWR2]  79.5,43.69 90 top
U$13  [SIG1]  79.5,54.23 90 top
U$14  [BYP0]  17.91,27.18 0 top
U$15  [PWM10]  35.05,55.24 90 bottom
U$16  [WEATHER4]  31.37,44.2 0 top
U$17  [RX25]  43.94,8.38 90 top
U$18  [5V0]  15.11,35.43 0 top
U$19  [BOOT2]  33.78,7.75 0 top
U$20  [ATMOSPHERIC0]  46.23,41.27 0 top
U$21  [VE0]  22.99,20.83 0 bottom
U$22  [LIGHTNING8]  52.45,50.42 0 top
U$23  [GND_P]  41.4,8.51 90 bottom
U$24  [PWR2]  74.42,43.81 90 bottom
U$25  [RX10]  51.56,8.51 90 bottom
U$26  [RESET3]  101.47,7.75 0 top
U$27  [CIPO0]  27.43,58.29 90 top
U$28  [TX24]  46.48,8.38 90 bottom
U$29  [RX10]  51.56,8.51 90 top
U$30  [RX25]  43.94,8.38 90 bottom
U$31  [TX13]  54.1,8.38 90 top
U$32  [GND_P]  49.02,8.51 90 top
U$33  [GND_P]  41.4,8.51 90 top
U$34  [SENSOR7]  41.15,49.28 0 top
U$35  [MICROSD0]  18.29,55.12 0 top
U$36  [GND_P]  56.64,8.51 90 top
U$37  [I2C]  50.67,16.38 90 top
U$38  [3V3_P]  59.18,8.38 90 top
U$39  [SDA_IO]  61.72,8.38 90 top
U$40  [SCL_IO]  64.26,8.51 90 top
U$41  [TX13]  54.1,8.38 90 bottom
U$42  [GND_P]  49.02,8.51 90 bottom
U$43  [SWD1]  24.89,32.26 0 top
U$44  [SFE_LOGO_FLAME_.2]  37.85,50.67 0 top
U$45  [GND_P]  56.64,8.51 90 bottom
U$46  [3V3_P]  59.18,8.38 90 bottom
U$47  [SDA_IO]  61.72,8.38 90 bottom
U$48  [SCL_IO]  64.26,8.51 90 bottom
U$49  [SCK_O]  32.51,59.18 90 bottom
U$50  [CIPO0]  27.43,58.42 90 bottom
U$51  [MEAS]  101.47,10.54 0 bottom
U$52  [!CS_O]  24.89,60.32 90 bottom
U$53  [GND_P]  22.35,59.18 90 bottom
U$54  [GND_P]  38.35,64.01 0 top
U$55  [22229]  40.42,39.25 0 top
U$56  [TX24]  46.48,8.38 90 top
U$57  [GND0]  74.42,48.89 90 bottom
U$58  [WEATHER4]  52.32,25.91 0 bottom
U$59  [PWM01]  37.72,55.12 90 bottom
U$60  [PWM01]  37.72,54.86 90 top
U$61  [PWM10]  35.05,54.99 90 top
U$62  [UV6]  42.55,50.55 0 top
U$63  [SIG1]  74.42,54.36 90 bottom
U$64  [SENSOR1]  48.39,39.88 0 top
U$65  [SOIL_MOISTURE2]  64.14,43.18 90 top
U$66  [WIND0]  64.01,32.13 90 top
U$67  [MICROMOD_LOGO_.5]  37.08,46.48 0 top
U$68  [MICROMOD_LOGO_.5]  46.48,28.45 0 bottom
U$69  [#0]  17.27,33.53 0 top
U$70  [#1]  24.38,33.53 0 top
U$71  [DETECTOR2]  52.7,48.89 0 top
U$72  [SCK_O]  106.93,58.93 90 top
U$73  [!CS_O]  99.31,59.94 90 top
U$74  [GND_P]  96.77,58.93 90 top
U$75  [GND_P]  117.6,64.01 0 bottom
U$76  [BOOT2]  108.2,7.75 0 top
U$77  [RX10]  125.98,8.51 90 top
U$78  [TX13]  128.52,8.38 90 top
U$79  [GND_P]  123.44,8.51 90 top
U$80  [GND_P]  115.82,8.51 90 top
U$81  [I2C]  125.09,16.38 90 top
U$82  [GND_P]  131.06,8.51 90 top
U$83  [3V3_P]  133.6,8.38 90 top
U$84  [SDA_IO]  136.14,8.38 90 top
U$85  [SCL_IO]  138.68,8.51 90 top
U$86  [GND_P]  115.82,8.51 90 bottom
U$87  [RX10]  125.98,8.51 90 bottom
U$88  [TX13]  128.52,8.38 90 bottom
U$89  [GND_P]  123.44,8.51 90 bottom
U$90  [GND_P]  131.06,8.51 90 bottom
U$91  [3V3_P]  133.6,8.38 90 bottom
U$92  [SDA_IO]  136.14,8.38 90 bottom
U$93  [SCL_IO]  138.68,8.51 90 bottom
U$94  [SCK_O]  106.93,59.18 90 bottom
U$95  [!CS_O]  99.31,60.32 90 bottom
U$96  [GND_P]  96.77,59.18 90 bottom
U$97  [22229]  114.85,39.25 0 top
U$98  [PWM10]  109.47,54.99 90 top
U$99  [GND_P]  112.78,64.01 0 top
U$100  [PWM10]  109.47,55.24 90 bottom
U$101  [RX25]  118.36,8.38 90 top
U$102  [TX24]  120.9,8.38 90 top
U$103  [TX24]  120.9,8.38 90 bottom
U$104  [RX25]  118.36,8.38 90 bottom
U$105  [PWM01]  112.14,55.12 90 bottom
U$106  [PWM01]  112.14,54.86 90 top
U$107  [LIGHTNING8]  126.87,50.42 0 top
U$108  [SENSOR7]  115.57,49.28 0 top
U$109  [UV6]  116.97,50.55 0 top
U$110  [RAIN1]  138.43,17.65 90 top
U$111  [SOIL_MOISTURE2]  138.56,43.18 90 top
U$112  [WIND0]  138.43,32.13 90 top
U$113  [GND0]  153.92,48.77 90 top
U$114  [PWR2]  153.92,43.69 90 top
U$115  [SIG1]  153.92,54.23 90 top
U$116  [WEATHER4]  105.79,44.2 0 top
U$117  [MICROSD0]  92.71,55.12 0 top
U$118  [SWD1]  99.31,32.26 0 top
U$119  [3V31]  88.52,57.02 0 top
U$120  [5V0]  89.53,35.43 0 top
U$121  [SFE_LOGO_FLAME_.2]  112.27,50.67 0 top
U$122  [WEATHER4]  126.75,25.91 0 bottom
U$123  [ATMOSPHERIC0]  120.65,41.27 0 top
U$124  [SENSOR1]  122.81,39.88 0 top
U$125  [MICROMOD_LOGO_.5]  111.51,46.48 0 top
U$126  [MICROMOD_LOGO_.5]  120.9,28.45 0 bottom
U$127  [PWR2]  148.84,43.81 90 bottom
U$128  [GND0]  148.84,48.89 90 bottom
U$129  [SIG1]  148.84,54.36 90 bottom
U$130  [COPI0]  104.39,58.42 90 top
U$131  [COPI0]  104.39,58.42 90 bottom
U$132  [#0]  91.69,33.53 0 top
U$133  [#1]  98.81,33.53 0 top
U$134  [DETECTOR2]  127.13,48.89 0 top
U$135  [BYP0]  92.33,27.18 0 top
U$136  [CIPO0]  101.85,58.29 90 top
U$137  [CIPO0]  101.85,58.42 90 bottom
U$138  [VE0]  97.41,20.83 0 bottom
U$139  [RESET3]  27.05,66.67 0 top
U$140  [MEAS]  27.05,69.47 0 bottom
U$141  [SCK_O]  32.51,117.86 90 top
U$142  [!CS_O]  24.89,118.87 90 top
U$143  [GND_P]  22.35,117.86 90 top
U$144  [GND_P]  43.18,122.94 0 bottom
U$145  [BOOT2]  33.78,66.67 0 top
U$146  [RX10]  51.56,67.44 90 top
U$147  [TX13]  54.1,67.31 90 top
U$148  [GND_P]  49.02,67.44 90 top
U$149  [GND_P]  41.4,67.44 90 top
U$150  [I2C]  50.67,75.31 90 top
U$151  [GND_P]  56.64,67.44 90 top
U$152  [3V3_P]  59.18,67.31 90 top
U$153  [SDA_IO]  61.72,67.31 90 top
U$154  [SCL_IO]  64.26,67.44 90 top
U$155  [GND_P]  41.4,67.44 90 bottom
U$156  [RX10]  51.56,67.44 90 bottom
U$157  [TX13]  54.1,67.31 90 bottom
U$158  [GND_P]  49.02,67.44 90 bottom
U$159  [GND_P]  56.64,67.44 90 bottom
U$160  [3V3_P]  59.18,67.31 90 bottom
U$161  [SDA_IO]  61.72,67.31 90 bottom
U$162  [SCL_IO]  64.26,67.44 90 bottom
U$163  [SCK_O]  32.51,118.11 90 bottom
U$164  [!CS_O]  24.89,119.25 90 bottom
U$165  [GND_P]  22.35,118.11 90 bottom
U$166  [22229]  40.42,98.18 0 top
U$167  [PWM10]  35.05,113.92 90 top
U$168  [GND_P]  38.35,122.94 0 top
U$169  [PWM10]  35.05,114.17 90 bottom
U$170  [RX25]  43.94,67.31 90 top
U$171  [TX24]  46.48,67.31 90 top
U$172  [TX24]  46.48,67.31 90 bottom
U$173  [RX25]  43.94,67.31 90 bottom
U$174  [PWM01]  37.72,114.05 90 bottom
U$175  [PWM01]  37.72,113.79 90 top
U$176  [LIGHTNING8]  52.45,109.35 0 top
U$177  [SENSOR7]  41.15,108.2 0 top
U$178  [UV6]  42.55,109.47 0 top
U$179  [RAIN1]  64.01,76.58 90 top
U$180  [SOIL_MOISTURE2]  64.14,102.11 90 top
U$181  [WIND0]  64.01,91.06 90 top
U$182  [GND0]  79.5,107.7 90 top
U$183  [PWR2]  79.5,102.62 90 top
U$184  [SIG1]  79.5,113.16 90 top
U$185  [WEATHER4]  31.37,103.12 0 top
U$186  [MICROSD0]  18.29,114.05 0 top
U$187  [SWD1]  24.89,91.19 0 top
U$188  [3V31]  14.1,115.95 0 top
U$189  [5V0]  15.11,94.36 0 top
U$190  [SFE_LOGO_FLAME_.2]  37.85,109.6 0 top
U$191  [WEATHER4]  52.32,84.84 0 bottom
U$192  [ATMOSPHERIC0]  46.23,100.2 0 top
U$193  [SENSOR1]  48.39,98.81 0 top
U$194  [MICROMOD_LOGO_.5]  37.08,105.41 0 top
U$195  [MICROMOD_LOGO_.5]  46.48,87.38 0 bottom
U$196  [PWR2]  74.42,102.74 90 bottom
U$197  [GND0]  74.42,107.82 90 bottom
U$198  [SIG1]  74.42,113.28 90 bottom
U$199  [COPI0]  29.97,117.35 90 top
U$200  [COPI0]  29.97,117.35 90 bottom
U$201  [#0]  17.27,92.46 0 top
U$202  [#1]  24.38,92.46 0 top
U$203  [DETECTOR2]  52.7,107.82 0 top
U$204  [BYP0]  17.91,86.11 0 top
U$205  [CIPO0]  27.43,117.22 90 top
U$206  [CIPO0]  27.43,117.35 90 bottom
U$207  [VE0]  22.99,79.76 0 bottom
U$208  [RESET3]  101.47,66.67 0 top
U$209  [MEAS]  101.47,69.47 0 bottom
U$210  [SCK_O]  106.93,117.86 90 top
U$211  [!CS_O]  99.31,118.87 90 top
U$212  [GND_P]  96.77,117.86 90 top
U$213  [GND_P]  117.6,122.94 0 bottom
U$214  [BOOT2]  108.2,66.67 0 top
U$215  [RX10]  125.98,67.44 90 top
U$216  [TX13]  128.52,67.31 90 top
U$217  [GND_P]  123.44,67.44 90 top
U$218  [GND_P]  115.82,67.44 90 top
U$219  [I2C]  125.09,75.31 90 top
U$220  [GND_P]  131.06,67.44 90 top
U$221  [3V3_P]  133.6,67.31 90 top
U$222  [SDA_IO]  136.14,67.31 90 top
U$223  [SCL_IO]  138.68,67.44 90 top
U$224  [GND_P]  115.82,67.44 90 bottom
U$225  [RX10]  125.98,67.44 90 bottom
U$226  [TX13]  128.52,67.31 90 bottom
U$227  [GND_P]  123.44,67.44 90 bottom
U$228  [GND_P]  131.06,67.44 90 bottom
U$229  [3V3_P]  133.6,67.31 90 bottom
U$230  [SDA_IO]  136.14,67.31 90 bottom
U$231  [SCL_IO]  138.68,67.44 90 bottom
U$232  [SCK_O]  106.93,118.11 90 bottom
U$233  [!CS_O]  99.31,119.25 90 bottom
U$234  [GND_P]  96.77,118.11 90 bottom
U$235  [22229]  114.85,98.18 0 top
U$236  [PWM10]  109.47,113.92 90 top
U$237  [GND_P]  112.78,122.94 0 top
U$238  [PWM10]  109.47,114.17 90 bottom
U$239  [RX25]  118.36,67.31 90 top
U$240  [TX24]  120.9,67.31 90 top
U$241  [TX24]  120.9,67.31 90 bottom
U$242  [RX25]  118.36,67.31 90 bottom
U$243  [PWM01]  112.14,114.05 90 bottom
U$244  [PWM01]  112.14,113.79 90 top
U$245  [LIGHTNING8]  126.87,109.35 0 top
U$246  [SENSOR7]  115.57,108.2 0 top
U$247  [UV6]  116.97,109.47 0 top
U$248  [RAIN1]  138.43,76.58 90 top
U$249  [SOIL_MOISTURE2]  138.56,102.11 90 top
U$250  [WIND0]  138.43,91.06 90 top
U$251  [GND0]  153.92,107.7 90 top
U$252  [PWR2]  153.92,102.62 90 top
U$253  [SIG1]  153.92,113.16 90 top
U$254  [WEATHER4]  105.79,103.12 0 top
U$255  [MICROSD0]  92.71,114.05 0 top
U$256  [SWD1]  99.31,91.19 0 top
U$257  [3V31]  88.52,115.95 0 top
U$258  [5V0]  89.53,94.36 0 top
U$259  [SFE_LOGO_FLAME_.2]  112.27,109.6 0 top
U$260  [WEATHER4]  126.75,84.84 0 bottom
U$261  [ATMOSPHERIC0]  120.65,100.2 0 top
U$262  [SENSOR1]  122.81,98.81 0 top
U$263  [MICROMOD_LOGO_.5]  111.51,105.41 0 top
U$264  [MICROMOD_LOGO_.5]  120.9,87.38 0 bottom
U$265  [PWR2]  148.84,102.74 90 bottom
U$266  [GND0]  148.84,107.82 90 bottom
U$267  [SIG1]  148.84,113.28 90 bottom
U$268  [COPI0]  104.39,117.35 90 top
U$269  [COPI0]  104.39,117.35 90 bottom
U$270  [#0]  91.69,92.46 0 top
U$271  [#1]  98.81,92.46 0 top
U$272  [DETECTOR2]  127.13,107.82 0 top
U$273  [BYP0]  92.33,86.11 0 top
U$274  [CIPO0]  101.85,117.22 90 top
U$275  [CIPO0]  101.85,117.35 90 bottom
U$276  [VE0]  97.41,79.76 0 bottom

## Library data of the parts
BT1-BT4 = SparkFun-Batteries; PROD_ID: BATT-14267
BYP BYP1-BYP3 JP1-JP20 MEAS MEAS1-MEAS3 = SparkFun-Jumpers
C1 C5 C12 C14 C16 C17 C21 C28 C29 C31 C32 C36 C43 C44 C46-C48 C52 C59 C60 = SparkFun-Capacitors; PROD_ID: CAP-00810
C2 C18 C33 C49 = SparkFun-Capacitors; PROD_ID: CAP-00811
C3 C4 C19 C20 C34 C35 C50 C51 = SparkFun-Capacitors; PROD_ID: CAP-08390
C6 C10 C22 C26 C37 C41 C53 C57 = SparkFun-Capacitors; PROD_ID: CAP-00868
C7 C9 C23 C25 C38 C40 C54 C56 = SparkFun-Capacitors; PROD_ID: CAP-11015
C8 C24 C39 C55 = SparkFun-Capacitors; PROD_ID: CAP-07886
C11 C13 C15 C27 C30 C42 C45 C58 = SparkFun-Capacitors; PROD_ID: CAP-07822
D1 D14 D25 D36 = SparkFun-DiscreteSemi; PROD_ID: DIO-11284
D2 D11 D15 D16 D26 D27 D37 D38 = SparkFun-LED; PROD_ID: DIO-00819
D3-D5 D8-D10 D17-D22 D28-D33 D39-D44 = SparkFun-DiscreteSemi; PROD_ID: DIO-09646
D6 D12 D23 D34 = SparkFun-DiscreteSemi; PROD_ID: DIO-14072
D7 D13 D24 D35 = SparkFun-DiscreteSemi; PROD_ID: DIO-11623
E$1-E$4 FD1-FD16 LOGO1-LOGO12 U$44 U$121 U$190 U$259 = SparkFun-Aesthetics
E$5 E$6 = SparkFun-Retired
F1-F4 = SparkFun-Fuses; PROD_ID: RES-14313
H1-H4 H6-H9 H11-H14 H16-H19 = SparkFun-Hardware
H5 H10 H15 H20 = SparkFun-Hardware; PROD_ID: HW-14899
J1 J10 J29 J43 = SparkFun-Connectors; PROD_ID: CONN-14122
J2 J5 J6 J8 J9 J12 J14 J17 J18 J20-J22 J27 J28 J31 J32 J34-J36 J41 J42 J45 J46 J48-J50 J55 J56 TP1-TP4 = SparkFun-Connectors
J3 J16 J30 J44 = SparkFun-Connectors; PROD_ID: CONN-13694
J4 J23 J37 J51 = SparkFun-Connectors; PROD_ID: CONN-14721
J7 J13 J24 J25 J38 J39 J52 J53 = SparkFun-Connectors; PROD_ID: CONN-08590; SF_ID: PRT-00132
J11 J19 J33 J47 = SparkFun-Connectors; PROD_ID: CONN-07820
J15 J26 J40 J54 = SparkFun-MicroMod; PROD_ID: CONN-14877
L1-L4 = SparkFun-Coils; PROD_ID: NDUC-11334
R1 R4 R22 R23 R40 R41 R58 R59 = SparkFun-Resistors; PROD_ID: RES-08272
R2 R3 R13 R17 R37 R38 R55 R56 = SparkFun-Resistors; PROD_ID: RES-12083
R5 R12 R19 R26 R29 R36 R44 R47 R54 R62 R65 R72 = SparkFun-Resistors; PROD_ID: RES-07828
R6 R7 R9 R14 R21 R24 R28 R31-R33 R42 R46 R49-R51 R60 R64 R67-R69 = SparkFun-Resistors; PROD_ID: RES-00824
R8 R18 R39 R57 = SparkFun-Resistors; PROD_ID: RES-07851
R10 R25 R43 R61 = SparkFun-Resistors; PROD_ID: RES-09383
R11 R20 R27 R30 R45 R48 R63 R66 = SparkFun-Resistors; PROD_ID: RES-07856
R15 R16 R34 R35 R52 R53 R70 R71 = SparkFun-Resistors; PROD_ID: RES-07858
S1-S8 = SparkFun-Switches; PROD_ID: SWCH-14139
U1 U6 U10 U14 = SparkFun-Sensors; PROD_ID: IC-13090
U2 U7 U11 U15 = SparkFun-Sensors; PROD_ID: IC-14149
U3 U8 U12 U16 = SparkFun-Sensors; PROD_ID: IC-11333
U4 U5 U9 U13 = SparkFun-IC-Power; PROD_ID: VREG-14094
U$1 U$18 U$119 U$120 U$188 U$189 U$257 U$258 = buzzard_labels (5)
U$2 U$7 U$8 U$26 U$55 U$97 U$130 U$131 U$139 U$166 U$199 U$200 U$208 U$235 U$268 U$269 = buzzard_labels (9)
U$3 U$65 U$66 U$110-U$112 U$179-U$181 U$248-U$250 = buzzard_labels (2)
U$4 U$12 U$13 U$16 U$24 U$57 U$58 U$63 U$113-U$116 U$122 U$127-U$129 U$182-U$185 U$191 U$196-U$198 U$251-U$254 U$260 U$265-U$267 = buzzard_labels (3)
U$5 U$6 U$9-U$11 U$23 U$32 U$33 U$36-U$40 U$42 U$45-U$49 U$51-U$54 U$72-U$75 U$79-U$86 U$89-U$96 U$99 U$140-U$144 U$148-U$155 U$158-U$165 U$168 U$209-U$213 U$217-U$224 U$227-U$234 U$237 = SparkFun-Buzzard
U$14 U$135 U$204 U$273 = buzzard_labels (11)
U$15 U$19 U$61 U$69-U$71 U$76 U$98 U$100 U$132-U$134 U$145 U$167 U$169 U$201-U$203 U$214 U$236 U$238 U$270-U$272 = buzzard_labels (10)
U$17 U$27 U$28 U$30 U$50 U$56 U$101-U$104 U$136 U$137 U$170-U$173 U$205 U$206 U$239-U$242 U$274 U$275 = buzzard_labels (12)
U$20 U$64 U$123 U$124 U$192 U$193 U$261 U$262 = buzzard_labels (73)
U$21 U$138 U$207 U$276 = buzzard_labels (76)
U$22 U$34 U$62 U$107-U$109 U$176-U$178 U$245-U$247 = buzzard_labels
U$25 U$29 U$31 U$41 U$77 U$78 U$87 U$88 U$146 U$147 U$156 U$157 U$215 U$216 U$225 U$226 = buzzard_labels (6)
U$35 U$43 U$117 U$118 U$186 U$187 U$255 U$256 = buzzard_labels (4)
U$59 U$60 U$105 U$106 U$174 U$175 U$243 U$244 = buzzard_labels (1)
U$67 U$68 U$125 U$126 U$194 U$195 U$263 U$264 = SparkFun-MicroMod

## Nets
3.3V: C3.1 C4.1 C5.1 C6.1 C46.1 D3.C D5.C D7.A D9.C J2.1 J3.2 J11.VCC J14.2 J15.2 J15.74 JP1.2 JP3.2 JP4.2 MEAS.2 MEAS.4 R7.2 R12.2 R14.2 R15.2 R16.2 R19.2 R21.2 U1.6 U1.8 U3.5 U3.6
3.3V1: C16.1 C19.1 C20.1 C21.1 C22.1 D13.A D17.C D19.C D21.C J16.2 J17.1 J19.VCC J22.2 J26.2 J26.74 JP5.2 JP7.2 JP9.2 MEAS1.2 MEAS1.4 R29.2 R31.2 R32.2 R33.2 R34.2 R35.2 R36.2 U6.6 U6.8 U8.5 U8.6
3.3V2: C31.1 C34.1 C35.1 C36.1 C37.1 D24.A D28.C D30.C D32.C J30.2 J31.1 J33.VCC J36.2 J40.2 J40.74 JP11.2 JP12.2 JP14.2 MEAS2.2 MEAS2.4 R47.2 R49.2 R50.2 R51.2 R52.2 R53.2 R54.2 U10.6 U10.8 U12.5 U12.6
3.3V3: C47.1 C50.1 C51.1 C52.1 C53.1 D35.A D39.C D41.C D43.C J44.2 J45.1 J47.VCC J50.2 J54.2 J54.74 JP16.2 JP17.2 JP19.2 MEAS3.2 MEAS3.4 R65.2 R67.2 R68.2 R69.2 R70.2 R71.2 R72.2 U14.6 U14.8 U16.5 U16.6
3.3V_EN: J15.4 JP6.1
3.3V_EN1: J26.4 JP10.1
3.3V_EN2: J40.4 JP15.1
3.3V_EN3: J54.4 JP20.1
!BOOT!: J15.11 S2.3 S2.4
!BOOT!1: J26.11 S4.3 S4.4
!BOOT!2: J40.11 S6.3 S6.4
!BOOT!3: J54.11 S8.3 S8.4
!RESET!: J2.10 J15.6 S1.3 S1.4
!RESET!1: J17.10 J26.6 S3.3 S3.4
!RESET!2: J31.10 J40.6 S5.3 S5.4
!RESET!3: J45.10 J54.6 S7.3 S7.4
GND: BT1.- C1.2 C2.- C3.2 C4.2 C5.2 C6.2 C7.2 C8.2 C9.2 C10.2 C11.2 C12.1 C13.2 C14.1 C46.2 D1.A D2.C D4.A D8.A D10.A D11.C H5.1 J1.GND J1.GND2 J2.3 J2.5 J2.9 J3.1 J4.2 J5.5 J6.3 J7.4 J8.1 J8.2 J11.CD1 J11.GND J11.GND1 J11.GND3 J12.3 J13.4 J13.5 J14.1 J15.1 J15.7 J15.33 J15.36 J15.39 J15.45 J15.75 L1.2 R2.1 R3.1 R6.1 R9.1 S1.1 S1.2 S2.1 S2.2 U1.1 U1.7 U2.1 U3.2 U3.4 U3.7 U3.9 U3.15 U3.16 U3.17 U5.4 U5.EP
GND1: BT2.- C15.2 C16.2 C17.2 C18.- C19.2 C20.2 C21.2 C22.2 C23.2 C24.2 C25.2 C26.2 C27.2 C28.1 C29.1 D14.A D15.C D16.C D18.A D20.A D22.A H10.1 J10.GND J10.GND2 J16.1 J17.3 J17.5 J17.9 J18.5 J19.CD1 J19.GND J19.GND1 J19.GND3 J20.3 J21.3 J22.1 J23.2 J24.4 J25.4 J25.5 J26.1 J26.7 J26.33 J26.36 J26.39 J26.45 J26.75 J27.1 J27.2 L2.2 R13.1 R17.1 R24.1 R28.1 S3.1 S3.2 S4.1 S4.2 U4.4 U4.EP U6.1 U6.7 U7.1 U8.2 U8.4 U8.7 U8.9 U8.15 U8.16 U8.17
GND2: BT3.- C30.2 C31.2 C32.2 C33.- C34.2 C35.2 C36.2 C37.2 C38.2 C39.2 C40.2 C41.2 C42.2 C43.1 C44.1 D25.A D26.C D27.C D29.A D31.A D33.A H15.1 J29.GND J29.GND2 J30.1 J31.3 J31.5 J31.9 J32.5 J33.CD1 J33.GND J33.GND1 J33.GND3 J34.3 J35.3 J36.1 J37.2 J38.4 J39.4 J39.5 J40.1 J40.7 J40.33 J40.36 J40.39 J40.45 J40.75 J41.1 J41.2 L3.2 R37.1 R38.1 R42.1 R46.1 S5.1 S5.2 S6.1 S6.2 U9.4 U9.EP U10.1 U10.7 U11.1 U12.2 U12.4 U12.7 U12.9 U12.15 U12.16 U12.17
GND3: BT4.- C45.2 C47.2 C48.2 C49.- C50.2 C51.2 C52.2 C53.2 C54.2 C55.2 C56.2 C57.2 C58.2 C59.1 C60.1 D36.A D37.C D38.C D40.A D42.A D44.A H20.1 J43.GND J43.GND2 J44.1 J45.3 J45.5 J45.9 J46.5 J47.CD1 J47.GND J47.GND1 J47.GND3 J48.3 J49.3 J50.1 J51.2 J52.4 J53.4 J53.5 J54.1 J54.7 J54.33 J54.36 J54.39 J54.45 J54.75 J55.1 J55.2 L4.2 R55.1 R56.1 R60.1 R64.1 S7.1 S7.2 S8.1 S8.2 U13.4 U13.EP U14.1 U14.7 U15.1 U16.2 U16.4 U16.7 U16.9 U16.15 U16.16 U16.17
HEADER_!CS!: J5.4 J15.44
HEADER_!CS!1: J18.4 J26.44
HEADER_!CS!2: J32.4 J40.44
HEADER_!CS!3: J46.4 J54.44
I2C_SCL: J3.4 J14.4 J15.14 R4.1 U1.4 U2.3
I2C_SCL1: J16.4 J22.4 J26.14 R23.1 U6.4 U7.3
I2C_SCL2: J30.4 J36.4 J40.14 R41.1 U10.4 U11.3
I2C_SCL3: J44.4 J50.4 J54.14 R59.1 U14.4 U15.3
I2C_SDA: J3.3 J14.3 J15.12 R1.1 U1.3 U2.2
I2C_SDA1: J16.3 J22.3 J26.12 R22.1 U6.3 U7.2
I2C_SDA2: J30.3 J36.3 J40.12 R40.1 U10.3 U11.2
I2C_SDA3: J44.3 J50.3 J54.12 R58.1 U14.3 U15.2
INP: C8.1 L1.1 R6.2 U3.3
INP1: C24.1 L2.1 R28.2 U8.3
INP2: C39.1 L3.1 R46.2 U12.3
INP3: C55.1 L4.1 R64.2 U16.3
LIGHTNING_!CS!: J15.42 R19.1 U3.8
LIGHTNING_!CS!1: J26.42 R29.1 U8.8
LIGHTNING_!CS!2: J40.42 R47.1 U12.8
LIGHTNING_!CS!3: J54.42 R65.1 U16.8
LIGHTNING_INT: J15.46 U3.10
LIGHTNING_INT1: J26.46 U8.10
LIGHTNING_INT2: J40.46 U12.10
LIGHTNING_INT3: J54.46 U16.10
N$1: C9.1 C10.1 C11.1 MEAS.1 MEAS.3 U5.1
N$2: JP1.3 R4.2
N$3: JP1.1 R1.2
N$4: JP4.1 R11.2
N$5: JP2.1 R20.2
N$6: D2.A R11.1
N$7: JP3.1 U2.4
N$8: R7.1 U1.5
N$9: J10.A5 R13.2
N$10: J1.A5 R2.2
N$11: J1.B5 R3.2
N$12: J10.B5 R17.2
N$13: BT2.+ D12.A R18.1
N$14: BT1.+ D6.A R8.1
N$15: C7.1 U3.1
N$16: D11.A R20.1
N$17: JP5.3 R23.2
N$18: JP5.1 R22.2
N$19: R21.1 U1.2
N$20: C25.1 C26.1 C27.1 MEAS1.1 MEAS1.3 U4.1
N$21: JP7.1 R27.2
N$22: D15.A R27.1
N$23: C23.1 U8.1
N$24: JP8.1 R30.2
N$25: D16.A R30.1
N$26: R32.1 U6.2
N$27: R31.1 U6.5
N$28: JP9.1 U7.4
N$29: J29.A5 R37.2
N$30: J29.B5 R38.2
N$31: BT3.+ D23.A R39.1
N$32: JP11.3 R41.2
N$33: JP11.1 R40.2
N$34: C40.1 C41.1 C42.1 MEAS2.1 MEAS2.3 U9.1
N$35: JP12.1 R45.2
N$36: D26.A R45.1
N$37: C38.1 U12.1
N$38: JP13.1 R48.2
N$39: D27.A R48.1
N$40: R50.1 U10.2
N$41: R49.1 U10.5
N$42: JP14.1 U11.4
N$43: J43.A5 R55.2
N$44: J43.B5 R56.2
N$45: BT4.+ D34.A R57.1
N$46: JP16.3 R59.2
N$47: JP16.1 R58.2
N$48: C56.1 C57.1 C58.1 MEAS3.1 MEAS3.3 U13.1
N$49: JP17.1 R63.2
N$50: D37.A R63.1
N$51: C54.1 U16.1
N$52: JP18.1 R66.2
N$53: D38.A R66.1
N$54: R68.1 U14.2
N$55: R67.1 U14.5
N$56: JP19.1 U15.4
PWM0: J9.2 J15.32
PWM1: J9.1 J15.47
PWM2: J26.32 J28.2
PWM3: J26.47 J28.1
PWM4: J40.32 J42.2
PWM5: J40.47 J42.1
PWM6: J54.32 J56.2
PWM7: J54.47 J56.1
RAIN: C14.2 D3.A D4.C J7.3 J15.18 R15.1
RAIN1: C29.2 D17.A D18.C J24.3 J26.18 R34.1
RAIN2: C44.2 D28.A D29.C J38.3 J40.18 R52.1
RAIN3: C60.2 D39.A D40.C J52.3 J54.18 R70.1
RTC_3V: D6.C D7.C J15.72 R8.2
RTC_3V1: D12.C D13.C J26.72 R18.2
RTC_3V2: D23.C D24.C J40.72 R39.2
RTC_3V3: D34.C D35.C J54.72 R57.2
RX1: J6.2 J15.19
RX2: J12.2 J15.20
RX3: J20.2 J26.19
RX4: J21.2 J26.20
RX5: J34.2 J40.19
RX6: J35.2 J40.20
RX7: J48.2 J54.19
RX8: J49.2 J54.20
SD_!CS!: J11.CS/DAT3 J15.55 R12.1
SD_!CS!1: J19.CS/DAT3 J26.55 R36.1
SD_!CS!2: J33.CS/DAT3 J40.55 R54.1
SD_!CS!3: J47.CS/DAT3 J54.55 R72.1
SOIL_MOIST_PWR: J4.3 J15.40
SOIL_MOIST_PWR1: J23.3 J26.40
SOIL_MOIST_PWR2: J37.3 J40.40
SOIL_MOIST_PWR3: J51.3 J54.40
SOIL_MOIST_SIG: J4.1 J15.34
SOIL_MOIST_SIG1: J23.1 J26.34
SOIL_MOIST_SIG2: J37.1 J40.34
SOIL_MOIST_SIG3: J51.1 J54.34
SPI_CIPO: J5.3 J11.DO/DAT0 J15.61 U3.12
SPI_CIPO1: J18.3 J19.DO/DAT0 J26.61 U8.12
SPI_CIPO2: J32.3 J33.DO/DAT0 J40.61 U12.12
SPI_CIPO3: J46.3 J47.DO/DAT0 J54.61 U16.12
SPI_COPI: J5.2 J11.DI/CMD J15.59 U3.13
SPI_COPI1: J18.2 J19.DI/CMD J26.59 U8.13
SPI_COPI2: J32.2 J33.DI/CMD J40.59 U12.13
SPI_COPI3: J46.2 J47.DI/CMD J54.59 U16.13
SPI_SCK: J5.1 J11.SCLK J15.57 U3.11
SPI_SCK1: J18.1 J19.SCLK J26.57 U8.11
SPI_SCK2: J32.1 J33.SCLK J40.57 U12.11
SPI_SCK3: J46.1 J47.SCLK J54.57 U16.11
SWDCK: J2.4 J15.21
SWDCK1: J17.4 J26.21
SWDCK2: J31.4 J40.21
SWDCK3: J45.4 J54.21
SWDIO: J2.2 J15.23 TP1.P$1
SWDIO1: J17.2 J26.23 TP2.P$1
SWDIO2: J31.2 J40.23 TP3.P$1
SWDIO3: J45.2 J54.23 TP4.P$1
TX1: J6.1 J15.17
TX2: J12.1 J15.22
TX3: J20.1 J26.17
TX4: J21.1 J26.22
TX5: J34.1 J40.17
TX6: J35.1 J40.22
TX7: J48.1 J54.17
TX8: J49.1 J54.22
USB_D+: J1.A6 J1.B6 J15.3
USB_D+1: J10.A6 J10.B6 J26.3
USB_D+2: J29.A6 J29.B6 J40.3
USB_D+3: J43.A6 J43.B6 J54.3
USB_D-: J1.A7 J1.B7 J15.5
USB_D-1: J10.A7 J10.B7 J26.5
USB_D-2: J29.A7 J29.B7 J40.5
USB_D-3: J43.A7 J43.B7 J54.5
V_USB: BYP.1 F2.1 J1.VBUS1 J1.VBUS2
V_USB1: BYP1.1 F1.1 J10.VBUS1 J10.VBUS2
V_USB2: BYP2.1 F3.1 J29.VBUS1 J29.VBUS2
V_USB3: BYP3.1 F4.1 J43.VBUS1 J43.VBUS2
VIN: BYP.2 C1.1 C2.+ C13.1 F2.2 J15.9 JP2.2 R5.2 R10.2 U5.8
VIN1: BYP1.2 C15.1 C17.1 C18.+ F1.2 J26.9 JP8.2 R25.2 R26.2 U4.8
VIN2: BYP2.2 C30.1 C32.1 C33.+ F3.2 J40.9 JP13.2 R43.2 R44.2 U9.8
VIN3: BYP3.2 C45.1 C48.1 C49.+ F4.2 J54.9 JP18.2 R61.2 R62.2 U13.8
VIN/1: J26.49 R24.2 R25.1
VIN/2: J40.49 R42.2 R43.1
VIN/3: J15.49 R9.2 R10.1
VIN/4: J54.49 R60.2 R61.1
VREG_EN: D1.C JP6.2 R5.1 U5.5
VREG_EN1: D14.C JP10.2 R26.1 U4.5
VREG_EN2: D25.C JP15.2 R44.1 U9.5
VREG_EN3: D36.C JP20.2 R62.1 U13.5
WDIR: D9.A D10.C J13.2 J15.38 R14.1
WDIR1: D21.A D22.C J25.2 J26.38 R33.1
WDIR2: D32.A D33.C J39.2 J40.38 R51.1
WDIR3: D43.A D44.C J53.2 J54.38 R69.1
WSPEED: C12.2 D5.A D8.C J13.3 J15.10 R16.1
WSPEED1: C28.2 D19.A D20.C J25.3 J26.10 R35.1
WSPEED2: C43.2 D30.A D31.C J39.3 J40.10 R53.1
WSPEED3: C59.2 D41.A D42.C J53.3 J54.10 R71.1